# Altium PCB nose_blink.PcbDoc
Units mil, origin at the board's own origin, x right, y up, seen from the top; angles counter-clockwise.
Board outline 345.47 x 708.9 mil, 2 copper layers (Layer 1 (Top Layer), Layer 4 (Bottom Layer)), stack 19.617 mil thick; 2 components, 4 nets, 8 pads, 9 vias.
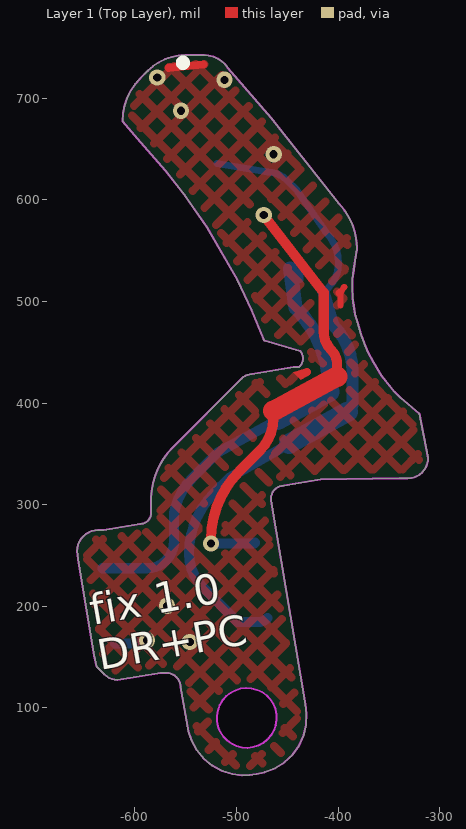
[diagram p0: Layer 1 (Top Layer) view]
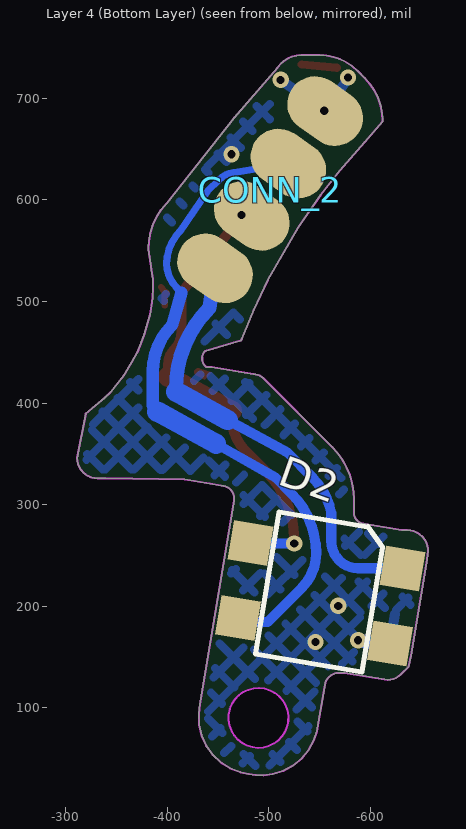
[diagram p1: Layer 4 (Bottom Layer) view, seen from below]

## Layer stack, top to bottom
Top Solder: solder mask 0.4, Solder Resist, Dk 3.5
Layer 1 (Top Layer): signal copper 0.7087
Dielectric 2: prepreg 2.8, PP-006, Dk 4.1
Dielectric 1: dielectric 12.6, FR-4, Dk 4.8
Dielectric 3: prepreg 2.8, PP-006, Dk 4.1
Layer 4 (Bottom Layer): signal copper 0.7087
Bottom Solder: solder mask 0.4, Solder Resist, Dk 3.5

## Board outline
-381.47,551.2 ccw(c-445.27,552.24) -399.43,596.63 -465.97,680.89 -508.23,729.73 ccw(c-532,714.01) -532.02,742.51 -550,742.51 ccw(c-550.01,689.83) -587.28,727.07 -594.47,719.88 ccw(c-551.9,677.3) -612.11,677.29 -594.37,656.93 -569.86,628.8 -551.27,605.17 -528.95,573.02 -499.02,521.23 -485.14,491.68 -473.36,462.93 ccw(c-470.97,463.56) -472.22,461.43 -437.16,451.23 cw(c-445.58,443.95) -438.47,435.38 -443.92,435.38 -484.83,428.47 ccw(c-484.85,414.43) -494.78,424.35 -562.46,356.67 ccw(c-510.73,304.93) -583.89,304.92 -583.89,291.94 cw(c-594.68,291.94) -594.68,281.15 -630.87,275.03 -636.09,275.03 ccw(c-636.09,254.32) -656.8,254.32 -655.44,242.81 -640.04,151.71 -637.58,140.57 -630.11,133.1 ccw(c-616.87,146.34) -616.87,127.62 -574.61,134.45 -569.09,134.45 cw(c-569.08,120.33) -554.95,120.32 -547.32,76.96 -544.38,68.32 -539.19,58.57 -532.25,50.11 -523.8,43.16 -514.14,38 -503.66,34.81 -494.55,33.62 -487.15,33.87 -480.47,34.74 -472.22,36.68 -462.02,40.55 -452.73,46.35 -444.76,53.85 -438.4,62.77 -433.9,72.75 -431.44,83.41 -431.1,94.34 -432.12,103.66 -465.97,303.95 -465.97,305.92 cw(c-453.08,305.92) -453.08,318.81 -441.94,320.69 -417.15,324.88 -365.92,325.64 -339.53,325.87 -331.5,325.87 ccw(c-331.5,346.03) -311.33,346.03 -319.83,389.69 -338.5,405.32 -344.35,410.95 -357.17,427.08 -365.13,440.28 -370.57,450.06 -374.06,458.84 -377.52,468.12 -380.57,478.27 -383.22,487.12 -384.54,496.01 -385.65,503.52 -385.84,513.65 -385.83,522.29 -384.53,531.05 -383.09,540.55
cut-out: -461.57,98.78 -460.49,93.46 -460.4,88.04 -461.31,82.69 -463.18,77.6 -465.96,72.93 -469.53,68.85 -473.8,65.5 -478.61,62.98 -483.79,61.38 -489.18,60.76 -494.6,61.14 -499.85,62.5 -504.76,64.8 -509.17,67.96 -512.93,71.87 -515.91,76.4 -517.11,78.94 -518.06,81.57 -519.14,86.88 -519.22,92.31 -518.32,97.66 -516.44,102.75 -513.67,107.41 -510.09,111.49 -505.83,114.85 -501.02,117.37 -495.84,118.96 -490.44,119.58 -485.03,119.21 -479.78,117.85 -474.86,115.55 -470.45,112.39 -466.69,108.48 -463.72,103.94 -462.52,101.41
board region "Layer Stack Region 1": -381.37,557.49 -381.47,551.2 -383.09,540.55 -384.52,531.05 -385.83,522.29 -385.84,513.65 -385.65,503.52 -384.54,496.01 -383.22,487.12 -380.57,478.27 -377.52,468.12 -374.06,458.84 -370.57,450.06 -365.13,440.28 -357.17,427.08 -344.35,410.95 -338.5,405.33 -319.83,389.69 -311.33,346.03 -311.33,342.02 -314.4,334.61 -320.07,328.94 -327.49,325.87 -331.5,325.87 -339.53,325.87 -365.92,325.64 -417.15,324.88 -441.94,320.69 -453.08,318.81 -455.59,318.56 -460.24,316.64 -463.8,313.08 -465.72,308.43 -465.97,305.92 -465.97,303.95 -432.12,103.66 -431.1,94.34 -431.44,83.41 -433.9,72.75 -438.4,62.77 -444.76,53.85 -452.73,46.35 -462.02,40.55 -472.21,36.68 -480.47,34.74 -487.15,33.87 -494.55,33.62 -503.66,34.81 -514.14,38 -523.8,43.16 -532.25,50.11 -539.19,58.57 -544.38,68.32 -547.32,76.96 -554.96,120.32 -555.23,123.08 -557.34,128.17 -561.23,132.07 -566.33,134.18 -569.09,134.45 -574.6,134.45 -616.87,127.62 -618.71,127.62 -622.33,128.34 -625.74,129.75 -628.8,131.8 -630.11,133.1 -637.58,140.57 -640.04,151.71 -655.44,242.81 -656.8,254.32 -656.8,258.44 -653.65,266.05 -647.82,271.88 -640.21,275.03 -636.09,275.03 -630.87,275.03 -594.68,281.15 -592.58,281.36 -588.69,282.97 -585.71,285.95 -584.1,289.84 -583.89,291.94 -583.89,304.92 -583.89,312.13 -581.08,326.27 -575.56,339.59 -567.56,351.58 -562.46,356.67 -494.78,424.35 -493.8,425.33 -491.5,426.87 -488.94,427.93 -486.22,428.47 -484.83,428.47 -443.92,435.39 -438.48,435.39 -436.92,436.96 -434.89,440.86 -434.52,445.24 -435.89,449.42 -437.16,451.23 -472.22,461.43 -472.79,461.87 -473.3,462.7 -485.14,491.68 -499.02,521.23 -528.95,573.02 -551.27,605.17 -569.86,628.8 -594.37,656.93 -612.11,677.29 -612.12,683.22 -609.8,694.86 -605.26,705.82 -598.67,715.69 -594.47,719.88 -587.28,727.07 -583.61,730.74 -574.98,736.51 -565.38,740.49 -555.2,742.51 -550,742.51 -532.02,742.51 -528.48,742.51 -521.63,740.79 -515.4,737.44 -510.18,732.68 -508.23,729.73 -465.97,680.89 -399.43,596.63 -395.06,592.11
board region "Layer Stack Region 1": -395.06,592.11 -388.24,581.55 -383.62,569.86 -381.37,557.48

## Design rules (kind name [scope] priority, off if disabled: settings)
Clearance [All] p1: gap=4 ignorepadtopadclearanceinfootprint=FALSE except(0: Arc-Hole Track-Hole SMDPad-Hole THPad-Hole Via-Hole Fill-Hole Poly-Hole Region-Hole Text-Hole)
DiffPairsRouting [All] p1: maxlimit=10 minlimit=10 mostfreqgap=10 toplayer_minwidth=15 toplayer_maxwidth=15 toplayer_prefwidth=15 bottomlayer_minwidth=15 bottomlayer_maxwidth=15 bottomlayer_prefwidth=15 substack1={A9119681-F30E-4965-AEFB-5FD7E99CBF57} toplayer_{a9119681-f30e-4965-aefb-5fd7e99cbf57}_minwidth=15 toplayer_{a9119681-f30e-4965-aefb-5fd7e99cbf57}_maxwidth=15 toplayer_{a9119681-f30e-4965-aefb-5fd7e99cbf57}_prefwidth=15 bottomlayer_{a9119681-f30e-4965-aefb-5fd7e99cbf57}_minwidth=15 bottomlayer_{a9119681-f30e-4965-aefb-5fd7e99cbf57}_maxwidth=15 bottomlayer_{a9119681-f30e-4965-aefb-5fd7e99cbf57}_prefwidth=15 substack2={F6C10761-EC22-4305-87DD-0F5299EFC78A} toplayer_{f6c10761-ec22-4305-87dd-0f5299efc78a}_minwidth=15 toplayer_{f6c10761-ec22-4305-87dd-0f5299efc78a}_maxwidth=15 toplayer_{f6c10761-ec22-4305-87dd-0f5299efc78a}_prefwidth=15 bottomlayer_{f6c10761-ec22-4305-87dd-0f5299efc78a}_minwidth=15 bottomlayer_{f6c10761-ec22-4305-87dd-0f5299efc78a}_maxwidth=15 bottomlayer_{f6c10761-ec22-4305-87dd-0f5299efc78a}_prefwidth=15 substack3={0C1598C2-43C3-4374-A8D4-C2A52B5AF5F3} toplayer_{0c1598c2-43c3-4374-a8d4-c2a52b5af5f3}_minwidth=15 toplayer_{0c1598c2-43c3-4374-a8d4-c2a52b5af5f3}_maxwidth=15 toplayer_{0c1598c2-43c3-4374-a8d4-c2a52b5af5f3}_prefwidth=15 bottomlayer_{0c1598c2-43c3-4374-a8d4-c2a52b5af5f3}_minwidth=15 bottomlayer_{0c1598c2-43c3-4374-a8d4-c2a52b5af5f3}_maxwidth=15 bottomlayer_{0c1598c2-43c3-4374-a8d4-c2a52b5af5f3}_prefwidth=15 maxuncoupledlength=500
PlaneClearance [All] p1: clearance=8
PlaneConnect GND [InNet('GND')] p1: planeconnectstyle=Direct reliefexpansion=20 reliefentries=4 reliefconductorwidth=10 reliefairgap=10
PlaneConnect [All] p2: planeconnectstyle=Direct reliefexpansion=20 reliefentries=4 reliefconductorwidth=10 reliefairgap=10
PolygonConnect GND_1 [InNet('GND')] p1: thpad.connectstyle=Relief thpad.reliefconductorwidth=10 thpad.reliefentries=4 thpad.polygonreliefangle="90 Angle" thpad.airgapwidth=10 smdpad.connectstyle=Relief smdpad.reliefconductorwidth=10 smdpad.reliefentries=4 smdpad.polygonreliefangle="90 Angle" smdpad.airgapwidth=10 via.connectstyle=Direct via.reliefconductorwidth=10 via.reliefentries=4 via.polygonreliefangle="90 Angle" via.airgapwidth=10
PolygonConnect [All] p2: connectstyle=Relief reliefconductorwidth=10 reliefentries=4 polygonreliefangle="90 Angle" airgapwidth=10
RoutingCorners [All] p1: cornerstyle=Round minsetback=100 maxsetback=100
RoutingVias [All] p1: holewidth=8 width=16 viastyle="Through Hole" minholewidth=4 minwidth=8 maxholewidth=12 maxwidth=24
SolderMaskExpansion [All] p1: expansion=4 istentingtop=FALSE
Width POWER [InNet('3.3V') or InNet('5V') or InNet('BATTERY_1') or InNet('VBAT')] p1: maxlimit=30 minlimit=4 preferedwidth=8 substack1={A9119681-F30E-4965-AEFB-5FD7E99CBF57} substack2={F6C10761-EC22-4305-87DD-0F5299EFC78A} substack3={0C1598C2-43C3-4374-A8D4-C2A52B5AF5F3} minimp=50.000000 maximp=50.000000 favimp=50.000000
Width [All] p2: maxlimit=10 minlimit=4 preferedwidth=6 substack1={A9119681-F30E-4965-AEFB-5FD7E99CBF57} substack2={F6C10761-EC22-4305-87DD-0F5299EFC78A} substack3={0C1598C2-43C3-4374-A8D4-C2A52B5AF5F3} minimp=50.000000 maximp=50.000000 favimp=50.000000
26 further rules are at their usual default settings.

## Components (designator, comment, footprint, x,y, rotation, side; value= is the part's Value field where it differs from the comment)
CONN_2 "BLINK" 4_POS_1MM_HEADER -501.25,610.02 r305 top
D2 "QRE1113GR" *4LEADSMD_QRE1113GR(PRIMARY) -550.53,212.31 r9.5 bottom

## Footprints (in the part's own frame and the unit in brackets; to place one, negate y for a bottom-side part, rotate by r counter-clockwise, add the part's x,y. Pads: shape width x height; smd on the part's side, far side on the other; paste and mask are expansions set on the pad)
4_POS_1MM_HEADER [mm]
  oval 1.4x2 smd far side: 1(-2.4,0) 2(-0.8,0) 3(0.8,0) 4(2.4,0)
  silkscreen extent -3.4,0.7 -3.3,0.8
*4LEADSMD_QRE1113GR(PRIMARY) [mm]
  rect 1x1 smd: A(-1.93,-0.97) C(1.93,0.94) E(-1.93,0.94) K(1.93,-0.97)
  silkscreen extent -1.35,-1.85 1.35,1.75, body extent -2.4,-1.8 2.4,1.8, height 1.85

## Part data
CONN_2: library part 4_pin_1mm_header
D2: "QRE1113 Series 30 V 50 mA Miniature Reflective Object Sensor - SMD-4", Package="SMD-4 ON Semiconductor", Availability=Unavailable, MF="ON Semiconductor", MP=QRE1113GR, Price=None, SnapEDA_Link=https://www.snapeda.com/parts/QRE1113GR/ON%20Semiconductor/view-part/?ref=snap

## Via types
v1: diameter 16, hole 8, Layer 1 (Top Layer) to Layer 4 (Bottom Layer), tented both sides, 9 vias

## Nets (pads, with @x,y where several pads share a name; then routed paths per layer and width w, separated by ;. In a path a pad name is that pad's centre, name@x,y a point inside that pad or via, vN(x,y) a via of type N, cw(c..) or ccw(c..) an arc to the next point about the centre after c; other vN are vias at no path point)
BLINK_CATHODE: CONN_2.3 D2.K | length 449.1
  Layer 1 (Top Layer) w10: v1(-525.03,261.81) -525.03,265.74 cw(c-430.11,265.74) -497.23,332.86 -477.01,353.09 ccw(c-509.29,385.37) -463.63,385.37 -463.63,392.44 ; v1@-474.46,586.27 -414.12,508.87 -414.12,470.16 ccw(c-388.96,470.16) -406.75,452.37 cw(c-420.98,438.14) -400.86,438.14 -400.86,426.04
  Layer 1 (Top Layer) w20: -463.63,392.44 -400.86,426.04
  Layer 4 (Bottom Layer) w10: v1(-525.03,261.81) -483.59,261.81 ccw(c-483.59,264.21) D2.K
  other v1: -473.11,585.16
BLINK_PWM: CONN_2.4 D2.A | length 451.8
  Layer 4 (Bottom Layer) w6: CONN_2.4@-436.79,520.99 CONN_2.4@-436.79,531.38
  Layer 4 (Bottom Layer) w10: D2.A -587.92,237.43 ccw(c-587.92,263.68) -569.35,245.12 ccw(c-588.5,264.26) -562.56,256.5 ccw(c-588.5,264.26) -561.43,264.26 -561.43,291.72 cw(c-495.16,279.4) -542.82,327.06 -518.43,351.44 -459.55,383.42
  Layer 4 (Bottom Layer) w14: CONN_2.4 -441.68,493.79 cw(c-521.73,413.75) -408.53,413.75
  Layer 4 (Bottom Layer) w20: -459.55,383.42 -408.63,411.25
BLINK_SIG: CONN_2.2 D2.C | length 664.9
  Layer 4 (Bottom Layer) w7: CONN_2.2 -469.17,627.37 cw(c-469.17,601.46) -450.83,619.76 -440.22,609.15 -412.52,568.98 cw(c-443.96,537.54) -399.49,537.54 cw(c-433.41,537.54) -409.43,513.55 -414.03,508.95 ; -390.22,391.64 -385.75,397.68
  Layer 4 (Bottom Layer) w10: D2.C cw(c-478.95,197.81) -478.95,184.43 -498.66,184.43 -532.75,218.52 cw(c-499.18,252.1) -546.66,252.1 cw(c-463.15,252.1) -522.2,311.15 -506.55,326.8 -448.08,360.02
  Layer 4 (Bottom Layer) w12: -414.03,508.95 -404.84,476.94 cw(c-450.92,430.86) -385.75,430.86 -385.75,397.68
  Layer 4 (Bottom Layer) w20: -448.08,360.02 -390.22,391.64
GND: CONN_2.1 D2.E | length 87.5
  Layer 1 (Top Layer) w6: -397.6,496.04 -397.6,505.22 cw(c-384.76,505.22) -393.84,514.3 -394.75,513.39
  Layer 1 (Top Layer) w8: -566.93,730.11 -532.44,733.14
  Layer 4 (Bottom Layer) w10: D2.E -596.53,163.27 ccw(c-596.53,173.24) -589.48,166.19 cw(c-588.54,165.25) -588.54,166.58 v1(-587.92,166.58)
  other v1: -545.85,164.87 -568.41,200.46 -463.34,644.9 -554.57,687.8 -511.67,718.21 -577.92,720.38

## Polygon pours and split planes (outlines as drawn)
GND on Layer 1 (Top Layer) "Layer 1 (Top Layer)-No Net" (hatched 45Degree grid 20 track 8, pour order 21): -381.47,551.2 ccw(c-445.27,552.24) -399.43,596.63 -465.97,680.89 -508.23,729.73 ccw(c-532,714.01) -532.02,742.51 -550,742.51 ccw(c-550.01,689.83) -587.28,727.07 -594.47,719.88 ccw(c-551.9,677.3) -612.11,677.29 -594.37,656.93 -569.86,628.8 -551.27,605.17 -528.95,573.02 -499.02,521.23 -485.14,491.68 -473.36,462.93 ccw(c-470.97,463.56) -472.22,461.43 -437.16,451.23 cw(c-445.58,443.95) -438.47,435.38 -443.92,435.38 -484.83,428.47 ccw(c-484.85,414.43) -494.78,424.35 -562.46,356.67 ccw(c-510.73,304.93) -583.89,304.92 -583.89,291.94 cw(c-594.68,291.94) -594.68,281.15 -630.87,275.03 -636.09,275.03 ccw(c-636.09,254.32) -656.8,254.32 -655.44,242.81 -640.04,151.71 -637.58,140.57 -630.11,133.1 ccw(c-616.87,146.34) -616.87,127.62 -574.61,134.45 -569.09,134.45 cw(c-569.08,120.33) -554.95,120.32 -547.32,76.96 -544.38,68.32 -539.19,58.57 -532.25,50.11 -523.8,43.16 -514.14,38 -503.66,34.81 -494.55,33.62 -487.15,33.87 -480.47,34.74 -472.22,36.68 -462.02,40.55 -452.73,46.35 -444.76,53.85 -438.4,62.77 -433.9,72.75 -431.44,83.41 -431.1,94.34 -432.12,103.66 -465.97,303.95 -465.97,305.92 cw(c-453.08,305.92) -453.08,318.81 -441.94,320.69 -417.15,324.88 -365.92,325.64 -339.53,325.87 -331.5,325.87 ccw(c-331.5,346.03) -311.33,346.03 -319.83,389.69 -338.5,405.32 -344.35,410.95 -357.17,427.08 -365.13,440.28 -370.57,450.06 -374.06,458.84 -377.52,468.12 -380.57,478.27 -383.22,487.12 -384.54,496.01 -385.65,503.52 -385.84,513.65 -385.83,522.29 -384.53,531.05 -383.09,540.55
GND on Layer 4 (Bottom Layer) "Layer 1 (Top Layer)-No Net1" (hatched 45Degree grid 20 track 8, pour order 22): -381.47,551.2 ccw(c-445.27,552.24) -399.43,596.63 -465.97,680.89 -508.23,729.73 ccw(c-532,714.01) -532.02,742.51 -550,742.51 ccw(c-550.01,689.83) -587.28,727.07 -594.47,719.88 ccw(c-551.9,677.3) -612.11,677.29 -594.37,656.93 -569.86,628.8 -551.27,605.17 -528.95,573.02 -499.02,521.23 -485.14,491.68 -473.36,462.93 ccw(c-470.97,463.56) -472.22,461.43 -437.16,451.23 cw(c-445.58,443.95) -438.47,435.38 -443.92,435.38 -484.83,428.47 ccw(c-484.85,414.43) -494.78,424.35 -562.46,356.67 ccw(c-510.73,304.93) -583.89,304.92 -583.89,291.94 cw(c-594.68,291.94) -594.68,281.15 -630.87,275.03 -636.09,275.03 ccw(c-636.09,254.32) -656.8,254.32 -655.44,242.81 -640.04,151.71 -637.58,140.57 -630.11,133.1 ccw(c-616.87,146.34) -616.87,127.62 -574.61,134.45 -569.09,134.45 cw(c-569.08,120.33) -554.95,120.32 -547.32,76.96 -544.38,68.32 -539.19,58.57 -532.25,50.11 -523.8,43.16 -514.14,38 -503.66,34.81 -494.55,33.62 -487.15,33.87 -480.47,34.74 -472.22,36.68 -462.02,40.55 -452.73,46.35 -444.76,53.85 -438.4,62.77 -433.9,72.75 -431.44,83.41 -431.1,94.34 -432.12,103.66 -465.97,303.95 -465.97,305.92 cw(c-453.08,305.92) -453.08,318.81 -441.94,320.69 -417.15,324.88 -365.92,325.64 -339.53,325.87 -331.5,325.87 ccw(c-331.5,346.03) -311.33,346.03 -319.83,389.69 -338.5,405.32 -344.35,410.95 -357.17,427.08 -365.13,440.28 -370.57,450.06 -374.06,458.84 -377.52,468.12 -380.57,478.27 -383.22,487.12 -384.54,496.01 -385.65,503.52 -385.84,513.65 -385.83,522.29 -384.53,531.05 -383.09,540.55

## Keep-outs
Keep-Out Layer:
  lines w2: -508.23,729.73 ccw(c-532,714.01) -532.02,742.51 -550,742.51 ccw(c-550.01,689.83) -587.28,727.07 -594.47,719.88 ccw(c-551.9,677.3) -612.11,677.29 -594.37,656.93 -569.86,628.8 -551.27,605.17 -528.95,573.02 -499.02,521.23 -485.14,491.68 -473.36,462.93 ccw(c-470.97,463.56) -472.22,461.43 -437.16,451.23 cw(c-445.58,443.95) -438.47,435.38 -443.92,435.38 -484.83,428.47 ccw(c-484.85,414.43) -494.78,424.35 -562.46,356.67 ccw(c-510.73,304.93) -583.89,304.92 -583.89,291.94 cw(c-594.68,291.94) -594.68,281.15 -630.87,275.03 -636.09,275.03 ccw(c-636.09,254.32) -656.8,254.32 -655.44,242.81 -640.04,151.71 -637.58,140.57 -630.11,133.1 ccw(c-616.87,146.34) -616.87,127.62 -574.61,134.45 -569.09,134.45 cw(c-569.08,120.33) -554.95,120.32 -547.32,76.96 -544.38,68.32 -539.19,58.57 -532.25,50.11 -523.8,43.16 -514.14,38 -503.66,34.81 -494.55,33.62 -487.15,33.87 -480.47,34.74 -472.22,36.68 -462.02,40.55 -452.73,46.35 -444.76,53.85 -438.4,62.77 -433.9,72.75 -431.44,83.41 -431.1,94.34 -432.12,103.66 -465.97,303.95 -465.97,305.92 cw(c-453.08,305.92) -453.08,318.81 -441.94,320.69 -417.15,324.88 -365.92,325.64 -339.53,325.87 -331.5,325.87 ccw(c-331.5,346.03) -311.33,346.03 -319.83,389.69 -338.5,405.32 -344.35,410.95 -357.17,427.08 -365.13,440.28 -370.57,450.06 -374.06,458.84 -377.52,468.12 -380.57,478.27 -383.22,487.12 -384.54,496.01 -385.65,503.52 -385.84,513.65 -385.83,522.29 -384.53,531.05 -383.09,540.55 -381.47,551.2 ccw(c-445.27,552.24) -399.43,596.63 -465.97,680.89 -508.23,729.73 ; -519.22,92.31 -518.32,97.66 -516.44,102.75 -513.67,107.41 -510.09,111.49 -505.83,114.85 -501.02,117.37 -495.84,118.96 -490.44,119.58 -485.03,119.21 -479.78,117.85 -474.86,115.55 -470.45,112.39 -466.69,108.48 -463.72,103.94 -462.52,101.41 -461.57,98.78 -460.49,93.46 -460.4,88.04 -461.31,82.69 -463.18,77.6 -465.96,72.93 -469.53,68.85 -473.8,65.5 -478.61,62.98 -483.79,61.38 -489.18,60.76 -494.6,61.14 -499.85,62.5 -504.76,64.8 -509.17,67.96 -512.93,71.87 -515.91,76.4 -517.11,78.94 -518.06,81.57 -519.14,86.88 -519.22,92.31

## Other copper
Layer 1 (Top Layer):
  region net GND: -443.92,430.27 -432.64,433.62 -429.28,426.78 -436.84,422.76

## Silkscreen, mask and mechanical layers (free items; w line width, h text height)
Top Overlay:
  text "fix 1.0 / DR+PC" at -633.84,136.84 h30 r10
Stiffener:
  lines w4: -467.2,302.71 -639.75,273.53 -643.39,272.54 -646.79,270.92 -649.85,268.7 -652.44,265.97 -654.5,262.81 -655.95,259.32 -656.74,255.66 -657.91,252.71 -638.33,139.79 -634.71,135.39 -632.12,132.65 -629.07,130.42 -625.68,128.79 -622.04,127.8 -618.48,127.48 -614.99,127.77 -576.21,134.32 -573,134.59 -569.83,134.3 -566.53,133.41 -563.47,131.94 -560.71,129.93 -558.37,127.46 -556.52,124.6 -555.22,121.44 -554.69,119.2 -548.12,80.35 -546.45,73.33 -542.15,62.97 -536.01,53.84 -528.2,46.09 -519.04,40.01 -508.87,35.83 -498.09,33.72 -490.7,33.5 -483.39,34.25 -477.36,35.27 -466.75,38.18 -456.92,43.1 -448.23,49.85 -441.02,58.16 -435.58,67.72 -432.1,78.16 -430.73,89.06 -431.49,99.93 -465.8,302.95 ; -519.22,92.31 -519.14,86.88 -518.06,81.57 -517.11,78.94 -515.91,76.4 -512.93,71.87 -509.17,67.96 -504.76,64.8 -499.85,62.5 -494.6,61.14 -489.18,60.76 -483.79,61.38 -478.61,62.98 -473.8,65.5 -469.53,68.85 -465.96,72.93 -463.18,77.6 -461.31,82.69 -460.4,88.04 -460.49,93.46 -461.57,98.78 -462.52,101.41 -463.72,103.94 -466.69,108.48 -470.45,112.39 -474.86,115.55 -479.78,117.85 -485.03,119.21 -490.44,119.58 -495.84,118.96 -501.02,117.37 -505.83,114.85 -510.09,111.49 -513.67,107.41 -516.44,102.75 -518.32,97.66 -519.22,92.31
Board Outline:
  lines w2: -508.23,729.73 ccw(c-532,714.01) -532.02,742.51 -550,742.51 ccw(c-550.01,689.83) -587.28,727.07 -594.47,719.88 ccw(c-551.9,677.3) -612.11,677.29 -594.37,656.93 -569.86,628.8 -551.27,605.17 -528.95,573.02 -499.02,521.23 -485.14,491.68 -473.36,462.93 ccw(c-470.97,463.56) -472.22,461.43 -437.16,451.23 cw(c-445.58,443.95) -438.47,435.38 -443.92,435.38 -484.83,428.47 ccw(c-484.85,414.43) -494.78,424.35 -562.46,356.67 ccw(c-510.73,304.93) -583.89,304.92 -583.89,291.94 cw(c-594.68,291.94) -594.68,281.15 -630.87,275.03 -636.09,275.03 ccw(c-636.09,254.32) -656.8,254.32 -655.44,242.81 -640.04,151.71 -637.58,140.57 -630.11,133.1 ccw(c-616.87,146.34) -616.87,127.62 -574.61,134.45 -569.09,134.45 cw(c-569.08,120.33) -554.95,120.32 -547.32,76.96 -544.38,68.32 -539.19,58.57 -532.25,50.11 -523.8,43.16 -514.14,38 -503.66,34.81 -494.55,33.62 -487.15,33.87 -480.47,34.74 -472.22,36.68 -462.02,40.55 -452.73,46.35 -444.76,53.85 -438.4,62.77 -433.9,72.75 -431.44,83.41 -431.1,94.34 -432.12,103.66 -465.97,303.95 -465.97,305.92 cw(c-453.08,305.92) -453.08,318.81 -441.94,320.69 -417.15,324.88 -365.92,325.64 -339.53,325.87 -331.5,325.87 ccw(c-331.5,346.03) -311.33,346.03 -319.83,389.69 -338.5,405.32 -344.35,410.95 -357.17,427.08 -365.13,440.28 -370.57,450.06 -374.06,458.84 -377.52,468.12 -380.57,478.27 -383.22,487.12 -384.54,496.01 -385.65,503.52 -385.84,513.65 -385.83,522.29 -384.53,531.05 -383.09,540.55 -381.47,551.2 ccw(c-445.27,552.24) -399.43,596.63 -465.97,680.89 -508.23,729.73 ; -519.22,92.31 -518.32,97.66 -516.44,102.75 -513.67,107.41 -510.09,111.49 -505.83,114.85 -501.02,117.37 -495.84,118.96 -490.44,119.58 -485.03,119.21 -479.78,117.85 -474.86,115.55 -470.45,112.39 -466.69,108.48 -463.72,103.94 -462.52,101.41 -461.57,98.78 -460.49,93.46 -460.4,88.04 -461.31,82.69 -463.18,77.6 -465.96,72.93 -469.53,68.85 -473.8,65.5 -478.61,62.98 -483.79,61.38 -489.18,60.76 -494.6,61.14 -499.85,62.5 -504.76,64.8 -509.17,67.96 -512.93,71.87 -515.91,76.4 -517.11,78.94 -518.06,81.57 -519.14,86.88 -519.22,92.31